# Altium PCB mmu_pcb_v1.1.PcbDoc
Units mm, origin at the board's own origin, x right, y up, seen from the top; angles counter-clockwise.
Board outline 92 x 88.54 mm, 2 copper layers (Top Layer, Bottom Layer); 59 components, 57 nets, 221 pads, 100 vias.
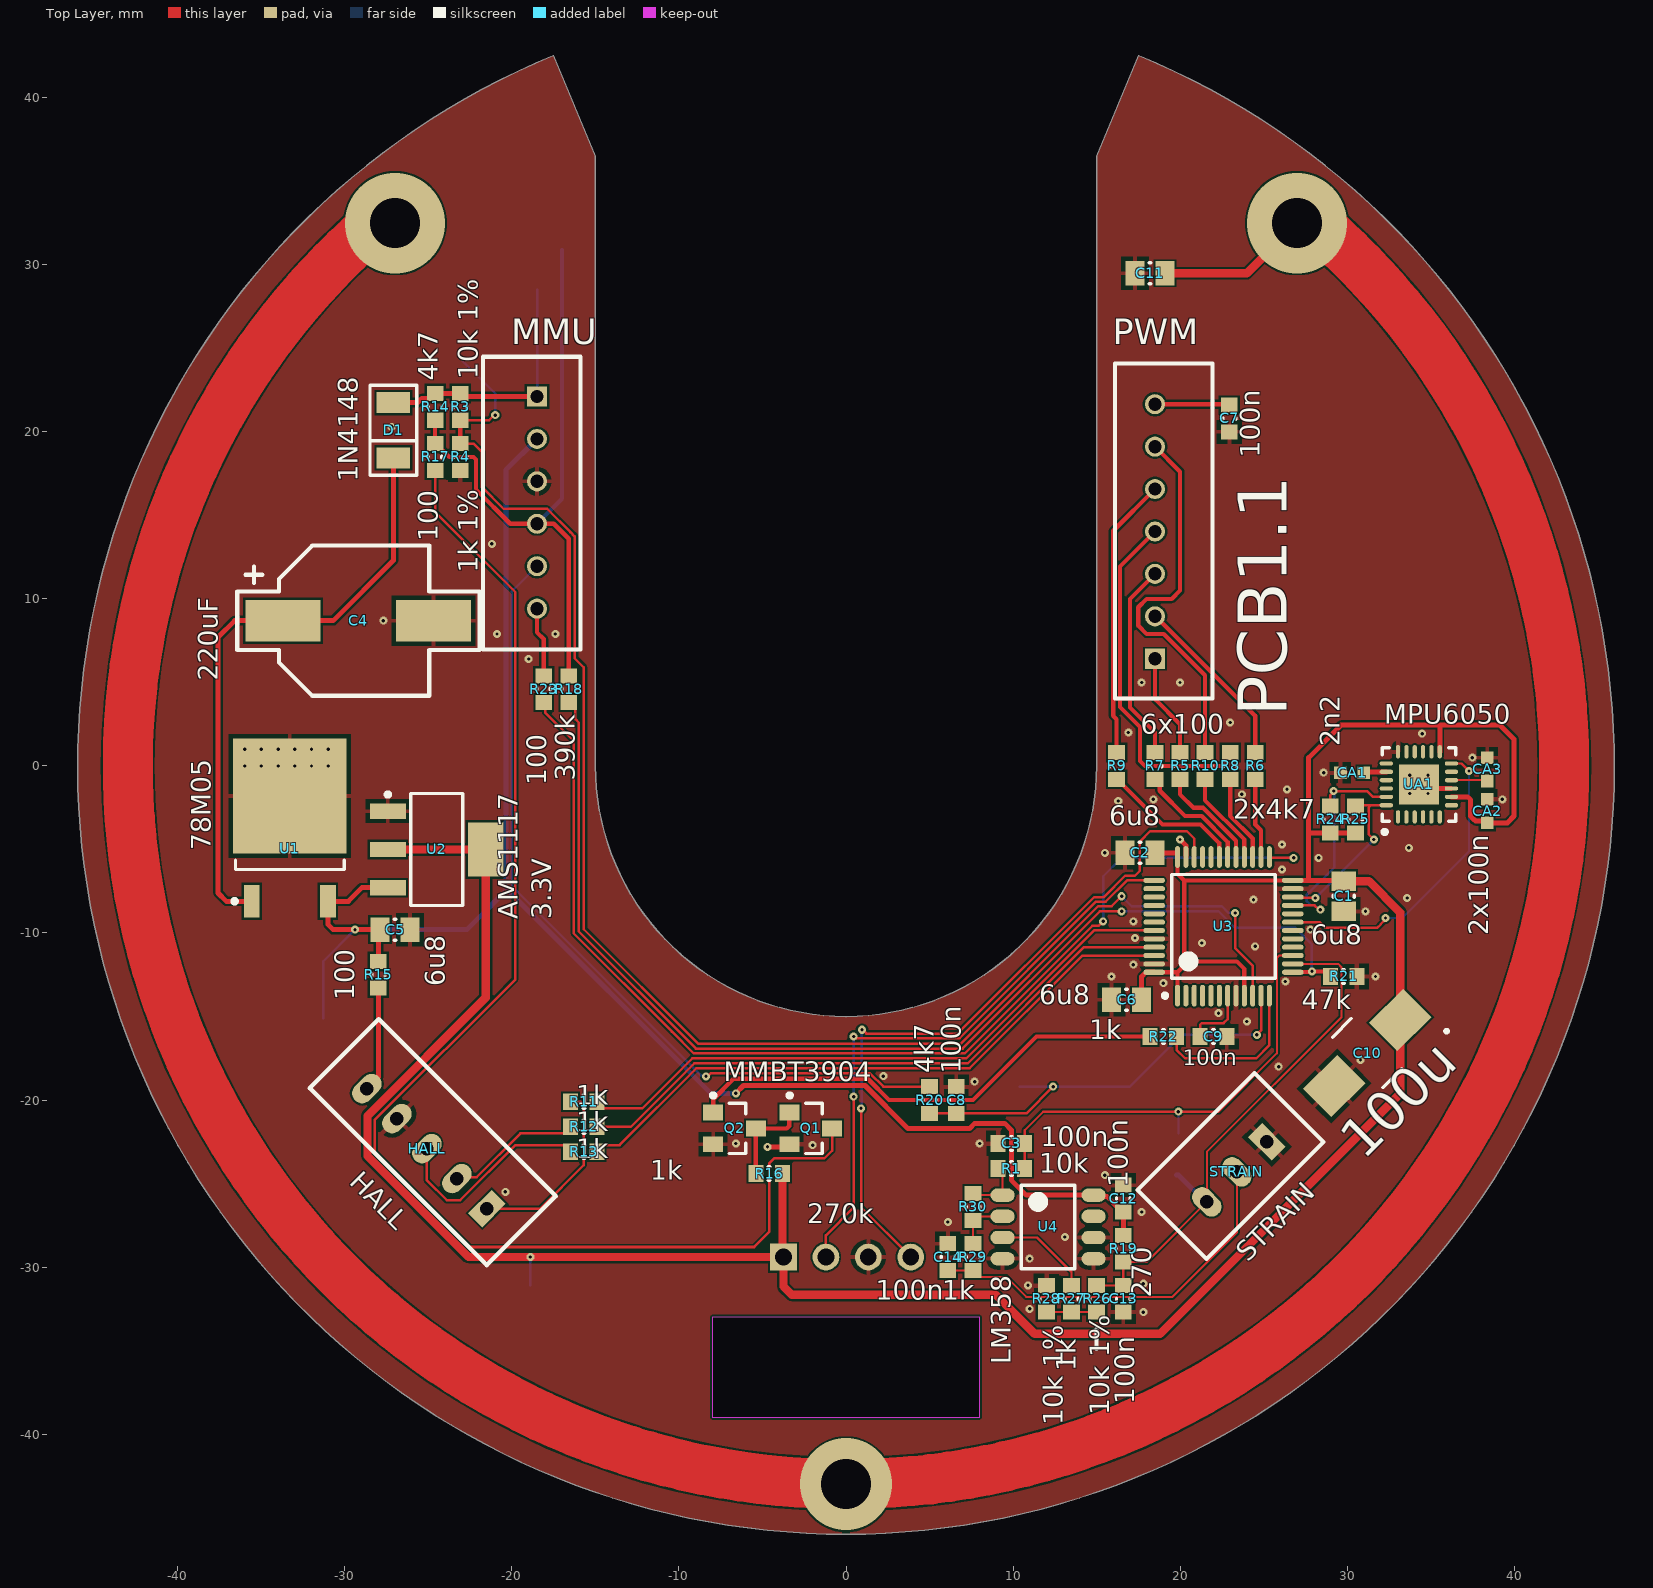
[diagram p0: Top Layer view]
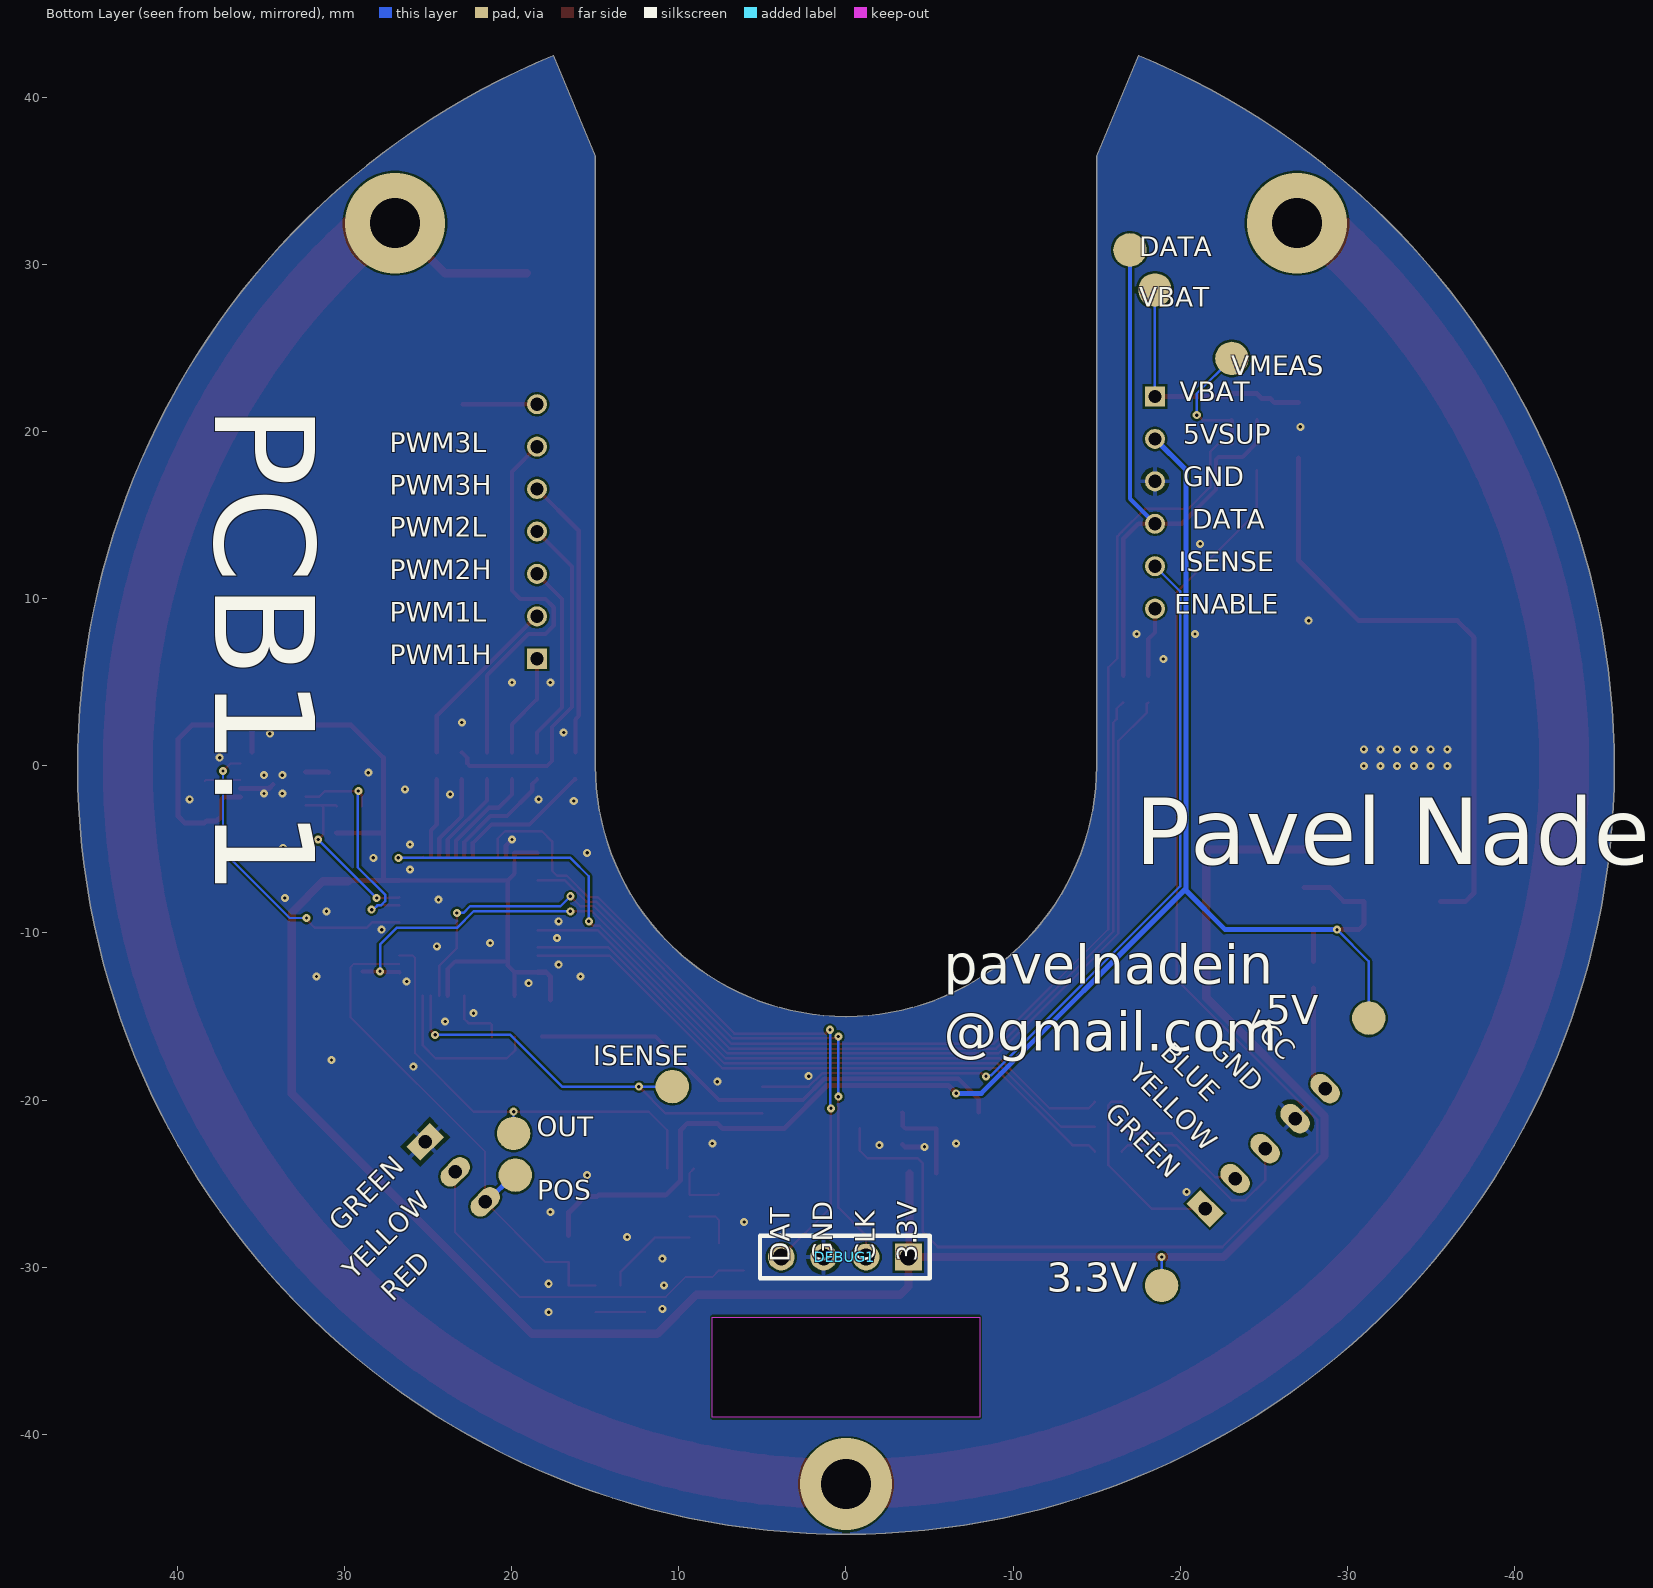
[diagram p1: Bottom Layer view, seen from below]

## Layer stack, top to bottom
Top Solder: solder mask 0.0102, Solder Resist, Dk 3.5
Top Layer: signal copper 0.0356
Dielectric 1: dielectric 0.32, FR-4, Dk 4.8
Bottom Layer: signal copper 0.0356
Bottom Solder: solder mask 0.0102, Solder Resist, Dk 3.5

## Board outline
-17.514,42.535 ccw(c0,0) 17.514,42.535 15,36.5 15,0 cw(c0,0) -15,0 -15,36.5
cut-out: -8,-39 8,-39 8,-33 -8,-33

## Design rules (kind name [scope] priority, off if disabled: settings)
Clearance [All] p1: gap=0.127 ignorepadtopadclearanceinfootprint=FALSE
DiffPairsRouting [All] p1: maxlimit=0.254 minlimit=0.127 mostfreqgap=0.254 toplayer_minwidth=0.127 toplayer_maxwidth=0.381 toplayer_prefwidth=0.381 bottomlayer_minwidth=0.127 bottomlayer_maxwidth=0.381 bottomlayer_prefwidth=0.381 maxuncoupledlength=12.7
HoleSize [All] p1: absolutevalues=TRUE maxlimit=6.3 minlimit=0.2 maxpercent=80.000 minpercent=20.000
HoleToHoleClearance [All] p1: gap=0.25 allowstackedmicrovias=TRUE
MinimumAnnularRing [All] p1: minimumring=0.13
MinimumSolderMaskSliver [All] p1: minsoldermaskwidth=0.05
PlaneClearance [All] p1: clearance=0.3
PlaneConnect Direct [IsVia] p1: planeconnectstyle=Direct reliefexpansion=0.508 reliefentries=4 reliefconductorwidth=0.254 reliefairgap=0.254
PlaneConnect [All] p2: planeconnectstyle=Relief reliefexpansion=0.508 reliefentries=4 reliefconductorwidth=0.254 reliefairgap=0.254
PolygonConnect DirectPolygonConnect [InNetClass('Direct') or IsVia or (CompParameterValue('ClassName')='DirectGND')] p1: connectstyle=Direct reliefconductorwidth=0.254 reliefentries=4 polygonreliefangle="90 Angle" airgapwidth=0.254
PolygonConnect Mainrule [All] p2: connectstyle=Relief reliefconductorwidth=0.254 reliefentries=4 polygonreliefangle="90 Angle" airgapwidth=0.254
RoutingVias [All] p1: holewidth=0.3 width=0.9 viastyle="Through Hole" minholewidth=0.2 minwidth=0.48 maxholewidth=6.3 maxwidth=8
SilkToSilkClearance [All] p1: silktosilkclearance=0.2
SilkToSolderMaskClearance [IsPad] p1: minsilkscreentomaskgap=0.15 clearancetoexposedcopper=TRUE
SolderMaskExpansion [All] p1: expansion=0.05 istentingtop=FALSE
UnRoutedNet [All] p1: checkbadconnections=TRUE
Width [All] p1: maxlimit=5 minlimit=0.127 preferedwidth=0.3
21 further rules are at their usual default settings.

## Components (designator, comment, footprint, x,y, rotation, side; value= is the part's Value field where it differs from the comment)
C1 "6u8" CAPC0805(2012)75_N 29.8,-7.8 r270 top
C2 "6u8" CAPC0805(2012)75_N 17.6,-5.2 r180 top
C3 "100n" CAPC0603(1608)55_N 9.9,-22.6 r180 top
C4 "220uF" "10X10.5 CAPACITOR" -33.7,8.7 r0 top
C5 "6u8" CAPC0805(2012)75_N -27,-9.8 r0 top
C6 "6u8" CAPC0805(2012)75_N 16.8,-14 r180 top
C7 "100n" CAPC0603(1608)55_N 22.954,20.804 r270 top
C8 "100n" CAPC0603(1608)55_N 6.6,-20 r90 top
C9 "100n" CAPC0603(1608)55_N 22,-16.2 r0 top
C10 "100uF" TC7343 31.2,-17.185 r225 top
C11 "6u8" CAPC0805(2012)75_N 18.2,29.5 r0 top
C12 "100n" CAPC0603(1608)55_N 16.6,-25.9 r90 top
C13 "100n" CAPC0603(1608)55_N 16.6,-31.9 r270 top
C14 "100n" CAPC0603(1608)55_N 6.1,-29.4 r90 top
CA1 "2n2" 0603C-GENERIC 29.6,-0.4 r0 top (schematic designator C2)
CA2 "100nF" 0603C-GENERIC 38.4,-2 r270 top (schematic designator C1)
CA3 "100nF" 0603C-GENERIC 38.4,0.5 r270 top (schematic designator C3)
D1 "1N4148" SOD80 -27.1,20.1 r270 top
DEBUG1 "SWD" "PIN HEADER SINGLE 4" -3.74,-29.4 r270 bottom
HALL "PIN HEADER 1x5" "XH2.54 5P" -21.5,-26.5 r225 top
MMU "PIN HEADER 1x6" "XH2.54 6P" -18.5,22.12 r0 top
PWM "PIN HEADER 1x7" "XH2.54 7P" 18.5,6.42 r180 top
Q1 "MMBT3904" SOT23 -2.1,-21.7 r0 top
Q2 "MMBT3904" SOT23 -6.675,-21.7 r0 top
R1 "10k" RESC0603(1608)_N 9.9,-24.1 r0 top
R3 "10k 1%" RESC0603(1608)_N -23.1,21.5 r90 top
R4 "1k 1%" RESC0603(1608)_N -23.1,18.5 r90 top
R5 "100" RESC0603(1608)_N 20,0 r90 top
R6 "100" RESC0603(1608)_N 24.5,0 r90 top
R7 "100" RESC0603(1608)_N 18.5,0 r90 top
R8 "100" RESC0603(1608)_N 23,0 r90 top
R9 "100" RESC0603(1608)_N 16.2,0 r90 top
R10 "100" RESC0603(1608)_N 21.5,0 r90 top
R11 "1k" RESC0603(1608)_N -15.7,-20.1 r180 top
R12 "1k" RESC0603(1608)_N -15.7,-21.6 r180 top
R13 "1k" RESC0603(1608)_N -15.7,-23.1 r180 top
R14 "4k7" RESC0603(1608)_N -24.6,21.5 r90 top
R15 "100" RESC0603(1608)_N -28,-12.5 r270 top
R16 "1k" RESC0603(1608)_N -4.6,-24.4 r0 top
R17 "100" RESC0603(1608)_N -24.6,18.5 r90 top
R18 "390k" RESC0603(1608)_N -16.6,4.6 r90 top
R19 "270" RESC0603(1608)_N 16.6,-28.9 r90 top
R20 "10k" RESC0603(1608)_N 5,-20 r90 top
R21 "TBD" RESC0603(1608)_N 29.8,-12.6 r180 top
R22 "1k" RESC0603(1608)_N 19,-16.2 r180 top
R23 "100" RESC0603(1608)_N -18.1,4.6 r90 top
R24 "4k7" RESC0603(1608)_N 29,-3.2 r270 top
R25 "4k7" RESC0603(1608)_N 30.5,-3.2 r270 top
R26 "10k 1%" RESC0603(1608)_N 15,-31.9 r90 top
R27 "1k" RESC0603(1608)_N 13.5,-31.9 r90 top
R28 "10k 1%" RESC0603(1608)_N 12,-31.9 r270 top
R29 "1k" RESC0603(1608)_N 7.6,-29.4 r90 top
R30 "270k" RESC0603(1608)_N 7.6,-26.4 r90 top
STRAIN "PIN HEADER 1x3" "XH2.54 3P" 25.196,-22.504 r315 top
U1 "78M05" TO-252 -33.3,-3.7 r90 top
U2 "AMS1117" SOT229P700X180-4N -24.5,-5 r0 top
U3 "STM32F100RBT6 LQFP48" LQFP48 22.6,-9.6 r90 top
U4 "LM358" SO8 12.1,-27.6 r0 top
UA1 "MPU-6050" QFN24 34.3,-1.1 r90 top (schematic designator U1)

## Footprints (in the part's own frame and the unit in brackets; to place one, negate y for a bottom-side part, rotate by r counter-clockwise, add the part's x,y. Pads: shape width x height; smd on the part's side, far side on the other; paste and mask are expansions set on the pad)
"10X10.5 CAPACITOR" [mm]
  rect 4.5x2.5 smd: +(0,0) -(9,0)
  silkscreen extent -2.75,-4.5 11.75,4.5, body extent -0.7,-4.15 9.2,4.15, height 10.2
0603C-GENERIC [mil] "CAPACITOR 0603"
  rect 30x30 smd: 1(0,0) 2(55,0)
  body extent -4,-15 59,15, height 19
CAPC0603(1608)55_N [mm] "Chip Capacitor, Body 1.6x0.8mm, Height 0.55mm, IPC Medium Density"
  rect 0.9x1 smd: 1(-0.8,0) 2(0.8,0)
  silkscreen extent -0.05,-0.4 0.05,0.4, body extent -0.87,-0.48 0.88,0.47, height 0.55
CAPC0805(2012)75_N [mm] "Chip Capacitor, Body 2.0x1.2mm, Height 0.75mm, IPC Medium Density"
  rect 1.15x1.45 smd: 1(-0.9,0) 2(0.9,0)
  silkscreen extent -0.05,-0.62 0.05,0.63, body extent -1.1,-0.72 1.1,0.73, height 0.75
LQFP48 [mm]
  oval 1.3x0.3 smd: 1(-4.15,2.75) 2(-4.15,2.25) 3(-4.15,1.75) 4(-4.15,1.25) 5(-4.15,0.75) 6(-4.15,0.25) 7(-4.15,-0.25) 8(-4.15,-0.75) 9(-4.15,-1.25) 10(-4.15,-1.75) 11(-4.15,-2.25) 12(-4.15,-2.75) 25(4.15,-2.75) 26(4.15,-2.25) 27(4.15,-1.75) 28(4.15,-1.25) 29(4.15,-0.75) 30(4.15,-0.25) 31(4.15,0.25) 32(4.15,0.75) 33(4.15,1.25) 34(4.15,1.75) 35(4.15,2.25) 36(4.15,2.75)
  oval 0.3x1.3 smd: 13(-2.75,-4.15) 14(-2.25,-4.15) 15(-1.75,-4.15) 16(-1.25,-4.15) 17(-0.75,-4.15) 18(-0.25,-4.15) 19(0.25,-4.15) 20(0.75,-4.15) 21(1.25,-4.15) 22(1.75,-4.15) 23(2.25,-4.15) 24(2.75,-4.15) 37(2.75,4.15) 38(2.25,4.15) 39(1.75,4.15) 40(1.25,4.15) 41(0.75,4.15) 42(0.25,4.15) 43(-0.25,4.15) 44(-0.75,4.15) 45(-1.25,4.15) 46(-1.75,4.15) 47(-2.25,4.15) 48(-2.75,4.15)
  silkscreen extent -4.27,-3.1 3.1,3.62, body extent -4.5,-4.5 4.5,4.5, height 1.42
"PIN HEADER SINGLE 4" [mm]
  rect 1.6x1.6 hole 1: 1(0,0)
  round 1.6 hole 1: 2(0,-2.54) 3(0,-5.08) 4(0,-7.62)
  silkscreen extent -1.27,-8.89 1.27,1.27, body extent -1.27,-8.89 1.27,1.27, height 8.19
QFN24 [mm] "QFN, 24-Leads, Body 4,00x4,00mm, Pitch 0,50mm, Thermal Pad 2,60x2,70mm, IPC Medium Density"
  oval 0.8x0.25 smd: 1(-1.95,1.25) 2(-1.95,0.75) 3(-1.95,0.25) 4(-1.95,-0.25) 5(-1.95,-0.75) 6(-1.95,-1.25) 13(1.95,-1.25) 14(1.95,-0.75) 15(1.95,-0.25) 16(1.95,0.25) 17(1.95,0.75) 18(1.95,1.25)
  oval 0.25x0.8 smd: 7(-1.25,-1.95) 8(-0.75,-1.95) 9(-0.25,-1.95) 10(0.25,-1.95) 11(0.75,-1.95) 12(1.25,-1.95) 19(1.25,1.95) 20(0.75,1.95) 21(0.25,1.95) 22(-0.25,1.95) 23(-0.75,1.95) 24(-1.25,1.95)
  rect 2.4x2.4 smd: 25(0,0)
  silkscreen extent -2.97,-2.2 2.2,2.2, body extent -2,-2 2,2, height 1
RESC0603(1608)_N [mm] "Chip Resistor, Body 1.6x0.8mm, IPC Medium Density"
  rect 0.9x1 smd: 1(-0.8,0) 2(0.8,0)
  silkscreen extent -0.05,-0.4 0.05,0.4, body extent -0.85,-0.47 0.85,0.47, height 0.6
SO8 [mm] "SOIC, 8-Leads, Body 4,90x4,00mm, Pitch 1,27mm, IPC Medium Density"
  oval 1.45x0.8 smd: 1(-2.725,1.905) 2(-2.725,0.635) 3(-2.725,-0.635) 4(-2.725,-1.905) 5(2.725,-1.905) 6(2.725,-0.635) 7(2.725,0.635) 8(2.725,1.905)
  silkscreen extent -1.6,-2.5 1.6,2.5, body extent -3.08,-2.5 3.08,2.5, height 2
SOD80 [mm]
  rect 1.25x2 smd: 1(-1.651,0) 2(1.651,0)
  silkscreen extent -2.7,-1.4 2.7,1.4, body extent -1.84,-0.8 1.86,0.8, height 1.61
SOT23 [mm] "SOT23, 3-Leads, Body 2,90x2,80mm, Pitch 0,95mm, IPC Medium Density"
  rect 1.2x0.95 smd: 1(-1.275,0.95) 2(-1.275,-0.95) 3(1.275,0)
  silkscreen extent -1.4,-1.5 0.67,2.1, body extent -1.13,-1.5 1.13,1.5, height 1.25
SOT229P700X180-4N [mm] "SOT223, 4-Leads, Body 6,50x7,00mm (avg), Pitch 2,29mm, IPC Medium Density"
  rect 2.15x0.9 smd: 1(-2.93,2.29) 2(-2.93,0) 3(-2.93,-2.29)
  rect 2.15x3.25 smd: 4(2.93,0)
  silkscreen extent -3.05,-3.35 1.55,3.41, body extent -3.54,-3.25 3.54,3.25, height 1.65
TC7343 [mm] "Chip Capacitor, 2-Leads, Body 7,30x4,30mm, IPC Medium Density"
  rect 2.9x2.4 smd: +(-2.794,0) -(2.794,0)
  silkscreen extent -4.39,-2.12 0.8,2.54, body extent -3.7,-2.22 3.7,2.22, height 3.01
TO-252 [mm] "D-PAK, 3-Pads, Body 6,21x6,61mm (max), IPC Medium Density"
  rect 1.95x0.95 smd: 1(-4.4,2.28) 3(-4.4,-2.28)
  rect 6.9x6.8 smd: 2(1.9,0)
  silkscreen extent -4.52,-3.25 -1.95,3.43, body extent -4.89,-3.3 4.81,3.28, height 2.3
"XH2.54 3P" [mm]
  rect 2x1.2 hole 0.8: 1(0,0)
  oval 2x1.2 hole 0.8: 2(0,-2.54) 3(0,-5.08)
  silkscreen extent -3.44,-7.52 2.4,2.39, body extent -3.35,-7.42 2.49,2.34, height 7.21
"XH2.54 5P" [mm]
  rect 2x1.2 hole 0.8: 1(0,0)
  oval 2x1.2 hole 0.8: 2(0,-2.54) 3(0,-5.08) 4(0,-7.62) 5(0,-10.16)
  silkscreen extent -3.44,-12.6 2.4,2.39, body extent -3.35,-12.5 2.49,2.34, height 7.21
"XH2.54 6P" [mm]
  rect 1.2x1.2 hole 0.8: 1(0,0)
  round 1.2 hole 0.8: 2(0,-2.54) 3(0,-5.08) 4(0,-7.62) 5(0,-10.16) 6(0,-12.7)
  silkscreen extent -3.24,-15.14 2.6,2.39, body extent -3.35,-15.04 2.49,2.34, height 7.21
"XH2.54 7P" [mm]
  rect 1.2x1.2 hole 0.8: 1(0,0)
  round 1.2 hole 0.8: 2(0,-2.54) 3(0,-5.08) 4(0,-7.62) 5(0,-10.16) 6(0,-12.7) 7(0,-15.24)
  silkscreen extent -3.44,-17.68 2.4,2.39, body extent -3.35,-17.58 2.49,2.34, height 7.21

## Part data
C1 C2 C3 C5 C6 C7 C8 C9 C11 C12 C13 C14: library part "Capacitor M", "Ceramic capacitor Medium density"
C4 C10: library part "Capacitor Electrolitic", "Capacitor Electrolitic"
CA1: library part 0603C-2N2-50V-C0G-MUR, "CAPACITOR 0603 CERAMIC", Reel=C4
CA2 CA3: library part 0603C-100NF-50V-X7R-TDK, "CAPACITOR 0603 CERAMIC", Capacitance=10000pF, Manufacturer="TDK Corporation", Manufacturer Part Number=C1608X7R1H103K, Operating Temperature="-55°C ~ 125°C", Package / Case="0603 (1608 metric)", Supplier Part Number 1=445-1314-2-ND, Temperature Coefficient=X7R, Tolerance=±10%, Voltage - Rated=50V, Category=Capacitors, Features="General Purpose", Lead Spacing=-, Mounting Type="Surface Mount, MLCC", Packaging="Tape & Reel (TR)", Reel=C68, RoHS="RoHS Compliant", Supplier 1=Digi-Key, Thickness=0.80mm
D1: "Small Signal Fast Switching Diodes", Average forward current="150 mA", Diode capacitance="4 pF", Forward continuous current="300 mA", Peak forward surge current="2 A", Repetitive peak forward current="500 mA", Repetitive peak reverse voltage="100 V", Reverse voltage="75 V", Supplier Part Number 1=78-MCL4148, Reverse recovery time="4 ~ 8 ns", Supplier 1=Mouser
DEBUG1: library part "SWD DEBUG", "SWD ST DEBUG"
HALL: library part "PIN HEADER 2.54 1x5"
MMU: library part "PIN HEADER 2.54 1x6"
PWM: library part "PIN HEADER 2.54 1x7"
Q1 Q2: library part 2N3904, "NPN General Purpose Transistor", Collector Current - Continuous=200mA, Collector-Base Voltage=60V, Collector-Emitter Voltage=40V, DC Current Gain=300
R1 R3 R4 R5 R6 R7 R8 R9 R10 R11 R12 R13 R14 R15 R16 R17 R18 R19 R20 R21 R22 R23 R24 R25 R26 R27 R28 R29 R30: library part "Resistor M", "Resistor Medium Density"
STRAIN: library part "PIN HEADER 2.54 1x3"
U1: "Linear Voltage Regulator", DC Input Voltage MAX=30V, Output Current=300..700mA
U2: "800mA LDO  15V max"
UA1: "Integrated 6-axis 3D accelerometer I2c interface"

## Free pads (board coordinates)
  round 2 smd far side: ""(-31.3,-15.1) ""(-23.1,24.4) ""(-18.9,-31.1) ""(-18.5,28.5) ""(-17,30.9) ""(10.4,-19.2) ""(19.8,-24.5) ""(19.9,-22)

## Via types
v1: diameter 0.48, hole 0.2, Top Layer to Bottom Layer, 97 vias
v2: diameter 6, hole 3, Top Layer to Bottom Layer, 2 vias
v3: diameter 5.5, hole 3, Top Layer to Bottom Layer, 1 vias

## Nets (pads, with @x,y where several pads share a name; then routed paths per layer and width w, separated by ;. In a path a pad name is that pad's centre, name@x,y a point inside that pad or via, vN(x,y) a via of type N, cw(c..) or ccw(c..) an arc to the next point about the centre after c; other vN are vias at no path point)
3V3: C1.1 C2.1 C6.1 C10.+ CA2.2 DEBUG1.1 pad.@-18.9,-31.1 R16.2 R24.2 R25.2 U2.2 U2.4 U3.1 U3.9 U3.24 U3.36 U3.48 UA1.8 UA1.13 | length 185.9
  Top Layer w0.254: U3.48 19.85,-12.35 ; U3.1@19.829,-13.7 U3.1@19.85,-13.721 ; U3.1 U3.1@19.85,-13.721 ; U3.36 19.85,-6.45 20.25,-6.85 ; U3.9 23.85,-12.15 23.4,-11.7 20.25,-11.7 ; U3.24 20.25,-6.85 ; U3.1@19.85,-13.721 19.85,-12.35 ; 19.85,-12.35 20.25,-11.95 20.25,-11.7 ; 20.25,-11.7 20.25,-6.85
  Top Layer w0.3: C6.1 17.7,-12.6 17.95,-12.35 U3.48 ; C2.1 19.85,-5.2 U3.36 ; U3.24 27.7,-6.85 29.75,-6.85 C1.1 ; 27.7,-6.8 27.7,-4 ; R25.2 R24.2 27.7,-4 ; UA1.13 35.55,2.45 ; UA1.8 37.224,-1.85 37.4,-2.026 37.4,-3.024 37.576,-3.2 37.6,-3.2 37.699,-3.299 38.302,-3.299 CA2.2 38.403,-3.4 39.6,-3.4 40,-3 40,1.6 39.15,2.45 35.55,2.45 ; 27.7,-4 27.7,0.5 29.65,2.45 35.55,2.45
  Top Layer w0.5: U2.2 U2.4 -21.57,-13.87 -28.652,-20.952 -28.652,-23.348 -22.6,-29.4 v1(-18.9,-29.4) DEBUG1.1 ; R16.2 -3.8,-29.34 DEBUG1.1 ; C1.1 31.3,-6.9 33.175,-8.775 33.175,-16.7 33.175,-19.625 18.8,-34 11.3,-34 8.952,-31.652 -3.255,-31.652 -3.74,-31.167 DEBUG1.1
  Bottom Layer w0.15: pad.@-18.9,-31.1 v1(-18.9,-29.4)
5V: C5.1 C12.1 MMU.2 pad.@-31.3,-15.1 R15.1 R19.2 U1.3 U2.3 U4.8 | length 103.1
  Top Layer w0.3: R15.1 -28,-9.9 C5.1 -30.7,-9.8 -31.02,-9.48 U1.3 -29.8,-8.1 -28.99,-7.29 U2.3 ; v1(-6.6,-19.6) -6.133,-19.133 1.133,-19.133 3.7,-21.7 7.4,-21.7 7.7,-21.4 9.5,-21.4 9.9,-21.8 9.9,-24.8 10.795,-25.695 U4.8 14.921,-25.791 15.641,-25.791 16.25,-26.4 16.55,-26.7 C12.1 R19.2
  Bottom Layer w0.15: pad.@-31.3,-15.1 -31.3,-11.7 v1(-29.4,-9.8)
  Bottom Layer w0.3: v1(-29.4,-9.8) -22.7,-9.8 -20.3,-7.4 ; MMU.2 -20.352,17.728 -20.352,-7.346 -20.3,-7.398 -20.3,-7.4 ; v1(-6.6,-19.6) -8.1,-19.6 -20.3,-7.4
ACC_INT: U3.19 UA1.12 | length 18.7
  Top Layer w0.127: UA1.12 36.85,0.15 v1(37.3,-0.3)
  Top Layer w0.15: U3.19 28.35,-9.35 28.7,-9.7 31.8,-9.7 32.018,-9.482 32.018,-9.471 32.3,-9.189 v1(32.3,-9.1)
  Bottom Layer w0.127: v1(32.3,-9.1) 33.3,-9.1 37.3,-5.1 v1(37.3,-0.3)
AGND: C11.2 | length 219.8
  Top Layer w0.5: C11.2 24,29.5 v2(27,32.5)
  Top Layer w3: v2@-27.378,33.158 ccw(c0,0) v2@27.478,33.075
  other v2: -27,32.5
  other v3: 0,-43
CPOUT: CA1.2 UA1.20 | length 1.4
  Top Layer w0.3: CA1.2 31.047,-0.35 UA1.20
DATABUS: MMU.4 pad.@-17,30.9 R14.1 R17.2 R18.2 | length 38
  Top Layer w0.254: R14.1 R17.2 -24.55,19.3 -23.75,18.5 -22.301,18.5 -22.152,18.351 -22.152,16.552 -20.1,14.5 MMU.4 -17.5,14.5 -16.6,13.6 R18.2
  Bottom Layer w0.254: MMU.4 -17,16 pad.@-17,30.9
DIS: MMU.6 R23.2 | length 4.2
  Top Layer w0.254: MMU.6 -18.5,8 -18.1,7.6 R23.2
GND: C1.2 C2.2 C3.2 C4.- C5.2 C6.2 C7.2 C8.2 C9.2 C10.- C11.1 C12.2 C13.2 C14.2 CA1.1 CA2.1 CA3.1 DEBUG1.3 HALL.4 MMU.3 Q1.2 Q2.2 R4.1 R21.1 R28.1 STRAIN.1 U1.2 U2.1 U3.8 U3.23 U3.35 U3.44 U3.47 U4.4 U4.5 U4.6 UA1.9 UA1.18 UA1.25 | length 4.6
  Top Layer w0.3: v1(-4.7,-22.8) -3.525,-22.8 Q1.2 ; v1(20,-4.4) 20.35,-4.75 U3.35 ; UA1.25 34.55,-1.35 UA1.9
  other v1: 17.8,-32.7 11,-32.5 10.9,-31.1 17.8,-31 11,-29.5 13.1,-28.2 6.1,-27.3 17.7,-26.7 -20.4,-25.5 15.5,-24.5 -2,-22.7 -6.6,-22.6 8,-22.6 7.7,-18.9 2.231,-18.569 25.9,-18 30.8,-17.6 24,-15.3 22.3,-14.8 19,-13 26.3,-12.9 15.9,-12.6 31.7,-12.6 17.2,-11.9 24.5,-10.8 21.3,-10.6 17.3,-10.3 27.8,-9.8 17.2,-9.3 31.1,-8.7 24.4,-8 33.6,-7.9 26.1,-6.2 28.3,-5.5 15.5,-5.2 33.7,-4.9 26.1,-4.7 16.3,-2.1 18.4,-2 39.3,-2 23.7,-1.7 33.75,-1.65 34.85,-1.65 26.4,-1.4 33.75,-0.55 34.85,-0.55 28.6,-0.4 -36,0 -35,0 -34,0 -33,0 -32,0 -31,0 37.5,0.5 -36,1 -35,1 -34,1 -33,1 -32,1 -31,1 34.5,1.933 16.9,2 23,2.6 17.7,5 20,5 -19,6.4 -20.9,7.9 -17.4,7.9 -27.7,8.7 -21.2,13.3 -27.2,20.3
HALL1: R11.1 U3.43 | length 37.9
  Top Layer w0.15: R11.1 -14.9,-20.125 -14.525,-20.5 -12.2,-20.5 -9.2,-17.5 7.208,-17.5 14.858,-9.85 U3.43
HALL2: R12.1 U3.45 | length 37.8
  Top Layer w0.15: R12.1 -12.876,-21.6 -9.076,-17.8 7.3,-17.8 14.25,-10.85 U3.45
HALL3: R13.1 U3.46 | length 38.2
  Top Layer w0.15: R13.1 -14.9,-23.075 -14.525,-22.7 -13.551,-22.7 -8.951,-18.1 7.4,-18.1 14.15,-11.35 U3.46
ISENSE: C8.1 pad.@10.4,-19.2 R20.1 U3.11 | length 26
  Top Layer w0.15: R20.1 C8.1 10.8,-20.8 v1(12.4,-19.2) ; v1(24.6,-16.1) 24.6,-16.087 24.85,-15.837 U3.11
  Bottom Layer w0.15: pad.@10.4,-19.2 v1(12.4,-19.2) 16.997,-19.2 20.097,-16.1 v1(24.6,-16.1)
MIDDLE: R26.1 R27.1 R28.2 | length 3
  Top Layer w0.127: R28.2 R26.1
NetC4_+: C4.+ D1.2 U1.1 | length 36.1
  Top Layer w0.3: U1.1 -37.1,-8.1 -37.6,-7.6 -37.6,7.7 -36.6,8.7 C4.+ -30.7,8.7 -27.1,12.3 D1.2
NetC7_1: C7.1 PWM.7 | length 4.5
  Top Layer w0.254: PWM.7 C7.1@22.954,21.66
NetHALL_1: HALL.1 R11.2 | length 11.4
  Top Layer w0.15: HALL.1 -18.3,-26.5 -15.7,-23.9 -15.7,-20.3 -15.9,-20.1 R11.2
NetHALL_2: HALL.2 R12.2 | length 8.1
  Top Layer w0.15: HALL.2 -23.214,-24.622 -22.122,-24.622 -19.5,-22 -16.875,-22 -16.5,-21.625 R12.2
NetHALL_3: HALL.3 R13.2 | length 12.5
  Top Layer w0.15: HALL.3 -25.092,-24.808 -23.9,-26 -23.1,-26 -19.8,-22.7 -16.875,-22.7 -16.5,-23.075 R13.2
NetHALL_5: HALL.5 R15.2 | length 6.3
  Top Layer w0.3: HALL.5 -28,-18.632 R15.2
NetMMU_5: MMU.5 R20.2 | length 49.9
  Top Layer w0.15: v1(-8.384,-18.584) -8.295,-18.584 -8.111,-18.4 1.437,-18.4 2.237,-19.2 R20.2
  Bottom Layer w0.15: MMU.5 -20,10.46 -20,-7.2 -8.679,-18.521 -8.448,-18.521 v1(-8.384,-18.584)
NetPWM_1: PWM.1 R5.2 | length 6.2
  Top Layer w0.254: PWM.1 18.5,4 20,2.5 R5.2
NetPWM_2: PWM.2 R6.2 | length 10.7
  Top Layer w0.254: PWM.2 18.54,8.96 24.5,3 R6.2
NetPWM_3: PWM.3 R7.2 | length 11.9
  Top Layer w0.254: R7.2 18.5,2 17,3.5 17,10 PWM.3
NetPWM_4: PWM.4 R8.2 | length 21.2
  Top Layer w0.254: PWM.4 16.404,11.944 16.404,3.525 17.6,2.329 17.6,0.3 17.9,0 22.522,0 22.67,0.149 22.67,0.477 22.993,0.8 R8.2
NetPWM_5: PWM.5 R9.2 | length 16.9
  Top Layer w0.254: R9.2 16.2,2.8 16,3 16,14.08 PWM.5
NetPWM_6: PWM.6 R10.2 | length 23.1
  Top Layer w0.254: PWM.6 20,17.62 20,10.5 19.5,10 18,10 17.5,9.5 17.5,8.4 18,7.9 19.029,7.9 21.5,5.429 R10.2
NetQ1_1: Q1.1 Q2.3 R16.1 | length 5.6
  Top Layer w0.254: R16.1 Q2.3 -3.549,-21.7 -3.4,-21.551 -3.4,-20.775 Q1.1
NetQ1_3: Q1.3 R17.1 | length 82.1
  Top Layer w0.15: R17.1 -24.6,15.2 -19.8,10.4 -19.8,-12.772 -28.2,-21.172 -28.2,-23.128 -22.528,-28.8 -5.5,-28.8 -4.6,-27.9 -4.6,-23.8 -4.3,-23.5 -1.3,-23.5 -0.825,-23.025 Q1.3
NetQ2_1: Q2.1 R22.2 | length 29.6
  Top Layer w0.254: Q2.1 -7.95,-19.95 -6.729,-18.729 1.3,-18.729 2.571,-20 7.6,-20 11.4,-16.2 R22.2
NetR23_1: R23.1 U3.25 | length 68.5
  Top Layer w0.15: R23.1 -18.013,3.713 -18.013,3.213 -16.3,1.5 -16.3,-10.024 -10.424,-15.9 -9.124,-17.2 7.117,-17.2 14.744,-9.573 15.127,-9.573 v1(15.4,-9.3) ; U3.25 25.4,-5.5 v1(26.8,-5.5)
  Bottom Layer w0.15: v1(15.4,-9.3) 15.4,-6.6 16.5,-5.5 v1(26.8,-5.5)
NetUA1_1: UA1.1
NetUA1_6: UA1.6
NetUA1_7: UA1.7
NetUA1_11: UA1.11
NetUA1_22: UA1.22
OP_IN+: R27.2 U4.3 | length 5.8
  Top Layer w0.127: U4.3 11.435,-28.235 13.5,-30.3 R27.2
OP_IN-: R29.2 R30.1 U4.2 | length 3.3
  Top Layer w0.127: R29.2 R30.1 7.835,-26.965 U4.2
OP_OUT: R1.1 R30.2 U4.1 | length 3.5
  Top Layer w0.127: R30.2 7.695,-25.695 U4.1 9.375,-24.375 R1.1
OP_OUT_F: C3.1 pad.@19.9,-22 R1.2 U3.15 | length 27.3
  Top Layer w0.127: R1.2 C3.1 10.7,-21.8 11.8,-20.7 v1(19.9,-20.7) 22.3,-20.7 25.8,-17.2 25.8,-11.5 25.95,-11.35 U3.15
  Bottom Layer w0.127: pad.@19.9,-22 v1(19.9,-20.7)
PH1L: R6.1 U3.26 | length 4.8
  Top Layer w0.254: R6.1 24.5,-3.5 24.85,-3.85 U3.26
PH2L: R8.1 U3.27 | length 5.2
  Top Layer w0.254: R8.1 23,-2.986 24.35,-4.336 U3.27
PH3L: R10.1 U3.28 | length 5.6
  Top Layer w0.254: R10.1 21.5,-2.057 23.85,-4.407 U3.28
PWM1H: R5.1 U3.29 | length 6.4
  Top Layer w0.254: R5.1 20,-1.7 20.8,-2.5 21.371,-2.5 23.35,-4.479 U3.29
PWM2H: R7.1 U3.30 | length 7
  Top Layer w0.254: R7.1 18.782,-1.082 18.782,-1.482 20.3,-3 21.3,-3 22.85,-4.55 U3.30
PWM3H: R9.1 U3.31 | length 8.6
  Top Layer w0.254: R9.1 16.25,-0.8 18.95,-3.5 21.229,-3.5 22.341,-4.613 22.341,-5.441 U3.31
REG_OUT: CA3.2 UA1.10 | length 2.2
  Top Layer w0.127: UA1.10 38.353,-0.85 CA3.2
RESET: C9.1 U3.7 | length 3.9
  Top Layer w0.15: C9.1 21.2,-15.5 21.3,-15.4 22.612,-15.4 22.85,-15.162 U3.7
RX: R18.1 R21.2 U3.13 | length 68.8
  Top Layer w0.15: R18.1 -16.575,3.8 -16.2,3.425 -16.2,2.8 -16,2.6 -16,-9.9 -8.981,-16.919 6.981,-16.919 15.2,-8.7 v1(16.5,-8.7)
  Top Layer w0.254: U3.13 26.759,-12.341 27.859,-12.341 v1(27.9,-12.3) R21.2@28.95,-12.3
  Bottom Layer w0.15: v1(16.5,-8.7) 22.3,-8.7 23.3,-9.7 26.9,-9.7 27.9,-10.7 v1(27.9,-12.3)
SCL: R24.1 U3.21 UA1.23 | length 14.3
  Top Layer w0.15: U3.21 28.061,-8.35 28.311,-8.6 v1(28.4,-8.6) ; R24.1 29,-1.74 29.2,-1.54 v1(29.2,-1.5) 31.2,-1.5 31.55,-1.85 UA1.23
  Bottom Layer w0.15: v1(28.4,-8.6) 28.311,-8.6 28.053,-8.342 27.842,-8.342 27.6,-8.1 27.6,-7.7 29.237,-6.063 29.237,-1.537 v1(29.2,-1.5)
SDA: R25.1 U3.22 UA1.24 | length 10.4
  Top Layer w0.15: U3.22 26.775,-7.875 28.075,-7.875 v1(28.1,-7.9) ; R25.1 30.55,-2.35 31.45,-2.35 ; v1@31.6,-4.399 31.3,-4.099 31.3,-2.5 31.45,-2.35 ; UA1.24 31.45,-2.35
  Bottom Layer w0.15: v1(28.1,-7.9) v1(31.6,-4.4)
SENS_MEAS: C14.1 R29.1 STRAIN.2 | length 23.2
  Top Layer w0.127: C14.1 R29.1 7.987,-30.586 9.587,-30.586 10.782,-31.782 19.546,-31.782 23.4,-27.929 STRAIN.2
SENS_POS: C13.1 pad.@19.8,-24.5 R19.1 R26.2 STRAIN.3 U3.14 | length 32.4
  Top Layer w0.127: R26.2 C13.1 R19.1 18,-29.7 STRAIN.3 21.604,-23.105 29.67,-15.039 29.67,-12.045 29.476,-11.85 U3.14
  Bottom Layer w0.3: pad.@19.8,-24.5 19.904,-24.5 21.5,-26.096 STRAIN.3
SWD_CLK: DEBUG1.2 U3.37 | length 35.8
  Top Layer w0.15: DEBUG1.2 -1.2,-28.1 0.458,-26.442 v1(0.458,-19.8) ; v1(0.458,-16.2) 0.547,-16.2 0.647,-16.3 6.8,-16.3 14.977,-8.123 15.552,-8.123 16.825,-6.85 U3.37
  Bottom Layer w0.15: v1(0.458,-19.8) v1(0.458,-16.2)
SWD_DAT: DEBUG1.4 U3.34 | length 42.2
  Top Layer w0.15: v1(0.9,-20.5) 0.9,-26.42 DEBUG1.4 ; v1(0.96,-15.793) 1.068,-15.9 1.1,-15.9 1.223,-16.023 6.685,-16.023 14.862,-7.846 15.437,-7.846 16.71,-6.573 17.3,-6.573 17.6,-6.273 17.6,-4.514 18.214,-3.9 20.4,-3.9 20.85,-4.35 U3.34
  Bottom Layer w0.15: v1(0.9,-20.5) 0.93,-20.47 0.93,-15.823 v1(0.96,-15.793)
TX: R22.1 U3.12 | length 9.8
  Top Layer w0.15: R22.1 19.8,-17 20.3,-17.5 24.565,-17.5 25.35,-16.715 U3.12
VBAT: D1.1 MMU.1 pad.@-18.5,28.5 R3.2 R14.2 | length 15.3
  Top Layer w0.3: D1.1 -25.649,21.751 -25.4,22 -24.9,22 R14.2 R3.2 -22.92,22.12 MMU.1
  Bottom Layer w0.15: MMU.1 pad.@-18.5,28.5
VMEAS: pad.@-23.1,24.4 R3.1 R4.2 U3.10 | length 93.3
  Top Layer w0.15: R4.2 -22.3,19.3 -21.8,18.8 -21.8,16.7 -20.5,15.4 -17.9,15.4 -16.5,14 -16.5,13.998 -16.248,13.746 -16.248,6.448 -15.7,5.9 -15.7,-9.776 -8.834,-16.642 6.858,-16.642 15.1,-8.4 15.9,-8.4 v1(16.5,-7.8) ; R3.1 -21.372,20.7 -21.072,21 v1(-21,21) ; v1(23.3,-8.8) 23.3,-10.9 24.35,-11.95 U3.10
  Top Layer w0.254: R4.2 R3.1
  Bottom Layer w0.15: pad.@-23.1,24.4 -21,22.3 v1(-21,21) ; v1(16.5,-7.8) 17.1,-8.4 22.5,-8.4 22.9,-8.8 v1(23.3,-8.8)
pads on no net: U3.2 U3.3 U3.4 U3.5 U3.6 U3.16 U3.17 U3.18 U3.20 U3.32 U3.33 U3.38 U3.39 U3.40 U3.41 U3.42 U4.7 UA1.2 UA1.3 UA1.4 UA1.5 UA1.14 UA1.15 UA1.16 UA1.17 UA1.19 UA1.21

## Polygon pours and split planes (outlines as drawn)
GND on Top Layer "TOP_GND" (solid, remove dead copper, pour order 0): -17.514,42.535 ccw(c0,0) 17.514,42.535 15,36.5 15,0 cw(c0,0) -15,0 -15,36.5
GND on Bottom Layer "BOT_GND" (solid, remove dead copper, pour order 1): -17.514,42.535 ccw(c0,0) 17.514,42.535 15,36.5 15,0 cw(c0,0) -15,0 -15,36.5

## Silkscreen, mask and mechanical layers (free items; w line width, h text height)
Top Overlay:
  lines w0.254: 15,-34.9 15,-33.7
  text "10k 1%" at -21.645,23.162 h2 r90
  text "4k7" at -24.06,23.059 h2 r90
  text "100n" at 25.153,18.44 h2 r90
  text "1N4148" at -28.847,17.005 h2 r90
  text "100" at -24.047,13.462 h2 r90
  text "1k 1%" at -21.656,11.579 h2 r90
  text "220uF" at -37.238,5.114 h2 r90
  text "PCB1.1" at 27.356,2.97 h5 r90
  text "MPU6050" at 32.233,2.136 h2
  text "6x100" at 17.64,1.547 h2
  text "2n2" at 29.942,1.181 h2 r90
  text "390k" at -15.847,-0.898 h2 r90
  text "100" at -17.547,-1.155 h2 r90
  text "2x4k7" at 23.181,-3.542 h2
  text "6u8" at 15.77,-3.953 h2
  text "78M05" at -37.647,-5.055 h2 r90
  text "AMS1117 / 3.3V" at -17.257,-9.186 h2 r90
  text "2x100n" at 38.853,-10.146 h2 r90
  text "6u8" at 27.87,-11.053 h2
  text "6u8" at -23.647,-13.195 h2 r90
  text "100" at -29.047,-14.019 h2 r90
  text "6u8" at 11.57,-14.653 h2
  text "47k" at 27.272,-14.95 h2
  text "1k" at 14.57,-16.753 h2
  text "100n" at 20.17,-18.253 h1.6
  text "4k7" at 5.64,-18.39 h2 r90
  text "100n" at 7.253,-18.43 h2 r90
  text "MMBT3904" at -7.311,-19.253 h2
  text "1k" at -16.163,-20.662 h2
  text "1k" at -16.163,-22.262 h2
  text "100n" at 11.67,-23.153 h2
  text "1k" at -16.163,-23.862 h2
  text "100u" at 31.537,-24.21 h4 r45
  text "10k" at 11.577,-24.753 h2
  text "1k" at -11.711,-25.153 h2
  text "100n" at 17.253,-25.229 h2 r90
  text "HALL" at -30.069,-25.254 h2 r315
  text "270k" at -2.33,-27.756 h2
  text "STRAIN" at 24.331,-30.005 h2 r45
  text "270" at 18.674,-31.829 h2 r90
  text "100n" at 1.771,-32.353 h2
  text "1k" at 5.77,-32.353 h2
  text "LM358" at 10.253,-35.829 h2 r90
  text "1k" at 14.153,-36.23 h2 r90
  text "100n" at 17.653,-38.229 h2 r90
  text "10k 1%" at 16.155,-38.885 h2 r90
  text "10k 1%" at 13.355,-39.471 h2 r90
Bottom Overlay:
  text "DATA" at -17.552,30.138 h2
  text "VBAT" at -17.571,27.094 h2
  text "VMEAS" at -23.071,22.994 h2
  text "PCB1.1" at 37.754,21.662 h6 r90
  text "VBAT" at -19.981,21.437 h2
  text "5VSUP" at -20.204,18.888 h2
  text "PWM3L" at 27.317,18.397 h2
  text "GND" at -20.204,16.348 h2
  text "PWM3H" at 27.317,15.857 h2
  text "DATA" at -20.743,13.808 h2
  text "PWM2L" at 27.317,13.328 h2
  text "ISENSE" at -19.912,11.268 h2
  text "PWM2H" at 27.317,10.788 h2
  text "ENABLE" at -19.65,8.728 h2
  text "PWM1L" at 27.317,8.248 h2
  text "PWM1H" at 27.317,5.697 h2
  text "Pavel Nadein" at -17.304,-5.899 h4
  text "VCC" at -23.595,-15.641 h2 r45
  text "5V" at -25.127,-16.077 h3
  text "GND" at -21.456,-17.311 h2 r45
  text "BLUE" at -18.496,-17.526 h2 r45
  text "pavelnadein / @gmail.com" at -5.841,-17.831 h4
  text "ISENSE" at 15.128,-18.293 h2
  text "YELLOW" at -16.591,-18.796 h2 r45
  text "GREEN" at -15.15,-21.165 h2 r45
  text "OUT" at 18.525,-22.562 h2
  text "POS" at 18.473,-26.362 h2
  text "GREEN" at 29.995,-28.23 h2 r315
  text "3.3V" at -4.639,-29.679 h2 r270
  text "CLK" at -2.099,-29.679 h2 r270
  text "GND" at 0.441,-29.711 h2 r270
  text "DAT" at 2.981,-29.711 h2 r270
  text "YELLOW" at 29.159,-31.094 h2 r315
  text "3.3V" at -12.006,-32.081 h3
  text "RED" at 26.859,-32.394 h2 r315
Top Solder:
  lines w3: -27.478,33.075 ccw(c0,0) 27.478,33.075
Overlay:
  lines w0.254: -17.514,42.535 ccw(c0,0) 17.514,42.535 15,36.5 15,0 cw(c0,0) -15,0 -15,36.5 -17.514,42.535 ; -8,-39 8,-39 8,-33 -8,-33 -8,-39